# Altium PCB LUMW.PcbDoc
Units mil, origin at the board's own origin, x right, y up, seen from the top; angles counter-clockwise.
Board outline 330 x 670 mil, 2 copper layers (Top Layer, Bottom Layer); 4 components, 4 nets, 9 pads, 1 vias.
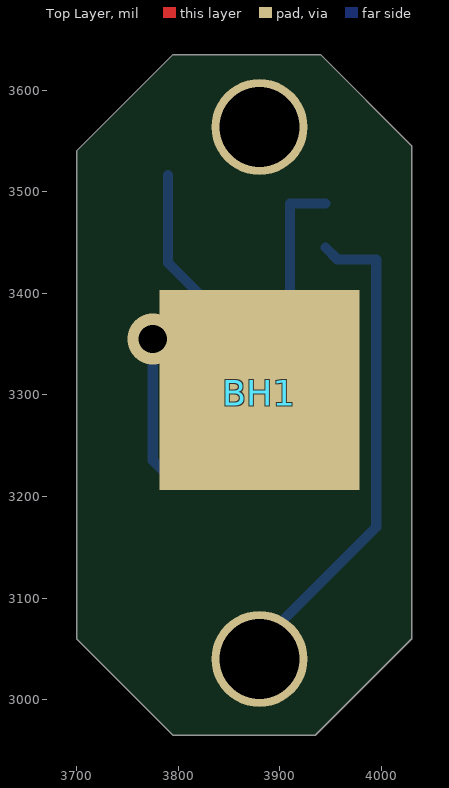
[diagram p0: Top Layer view]
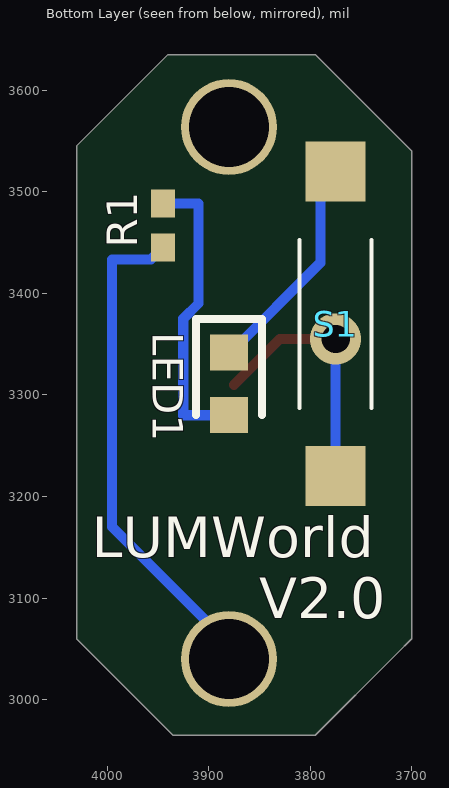
[diagram p1: Bottom Layer view, seen from below]

## Layer stack, top to bottom
Top Solder: solder mask 0.4, Solder Resist, Dk 3.5
Top Layer: signal copper 1.4
Dielectric 1: dielectric 12.6, FR-4, Dk 4.8
Bottom Layer: signal copper 1.4
Bottom Solder: solder mask 0.4, Solder Resist, Dk 3.5

## Board outline
3700,3060 3715,3045 3795,2965 3935,2965 4030,3060 4030,3545 3940,3635 3795,3635 3700,3540
cut-out: 3570,3775

## Design rules (kind name [scope] priority, off if disabled: settings)
Clearance [All] p1: gap=10 ignorepadtopadclearanceinfootprint=TRUE except(0: Arc-Hole Track-Hole SMDPad-Hole THPad-Hole Via-Hole Fill-Hole Poly-Hole Region-Hole Text-Hole)
PolygonConnect [All] p1: connectstyle=Relief reliefconductorwidth=10 reliefentries=4 polygonreliefangle="90 Angle" airgapwidth=10
RoutingVias [All] p1: holewidth=28 width=50 viastyle="Through Hole" minholewidth=28 minwidth=50 maxholewidth=28 maxwidth=50
SolderMaskExpansion [All] p1: expansion=4
Width [All] p1: maxlimit=10 minlimit=10 preferedwidth=10
30 further rules are at their usual default settings.

## Components (designator, comment, footprint, x,y, rotation, side; value= is the part's Value field where it differs from the comment)
BH1 "Battery" BHX1-1025-PC 3880,3040 r90 top
LED1 "LTST-C191KGKT" LEDC1608X55N 3880,3311.5 r270 bottom
R1 "0-100" RESC1005X40N 3945,3466.65 r270 bottom
S1 "RI-80SMD0515-J" RI80SMD0510J 3775,3370 r270 bottom

## Footprints (in the part's own frame and the unit in brackets; to place one, negate y for a bottom-side part, rotate by r counter-clockwise, add the part's x,y. Pads: shape width x height; smd on the part's side, far side on the other; paste and mask are expansions set on the pad)
BHX1-1025-PC [mm]
  round 2.4 hole 2: 1(0,0) 2(13.3,0)
  rect 5x5 smd: 3(6.731,0)
  body extent -0.76,-3.43 14.06,4.83, height 3.56
LEDC1608X55N [mm]
  rect 0.9x0.95 smd: 1(-0.762,0) 2(0.8,0)
  silkscreen extent -1.6,-0.82 0.8,0.82, body extent -1.14,-0.45 1.14,0.45, height 0.51
RESC1005X40N [mm]
  rect 0.7x0.6 smd: 1(-0.55,0) 2(0.55,0)
  body extent -0.5,-0.25 0.5,0.25, height 1.27
RI80SMD0510J [mm]
  rect 1.5x1.5 smd: 1(-3.81,0) 2(3.81,0)
  silkscreen extent -2.1,-0.9 2.1,0.9

## Part data
BH1: library part BH?, "Battery Holder for BK-870"
LED1: "LED", Manufacturer_Name=Lite-On, Mouser Part Number=859-LTST-C191KGKT, RS Part Number=6921010P, Datasheet Link=http://www.mouser.com/ds/2/239/S_110_LTST-C191KGKT-369560.pdf, Height=0.55mm, Manufacturer_Part_Number=LTST-C191KGKT, Mouser Price/Stock=https://www.mouser.com/Search/Refine.aspx?Keyword=859-LTST-C191KGKT, RS Price/Stock=http://uk.rs-online.com/web/p/products/6921010P
R1: library part RMCF0402ZT0R00, "Resistor", Manufacturer_Name="Stackpole Electronics Inc.", Datasheet Link=https://www.seielect.com/catalog/sei-rmcf_rmcp.pdf, Height=0.4mm, Manufacturer_Part_Number=RMCF0402ZT0R00
S1: "Switch", Manufacturer_Name="Coto Technology", Mouser Part Number=816-RI-80SMD0515-J, Datasheet Link=http://www.comus-intl.com/wp-content/uploads/2018/10/RI-80SMD.pdf, Manufacturer_Part_Number=RI-80SMD0515-J, Mouser Price/Stock=https://www.mouser.com/Search/Refine.aspx?Keyword=816-RI-80SMD0515-J

## Via types
v1: diameter 50, hole 28, Top Layer to Bottom Layer, 1 vias

## Nets (pads, with @x,y where several pads share a name; then routed paths per layer and width w, separated by ;. In a path a pad name is that pad's centre, name@x,y a point inside that pad or via, vN(x,y) a via of type N, cw(c..) or ccw(c..) an arc to the next point about the centre after c; other vN are vias at no path point)
NetBH1_1: BH1.1 R1.2 | length 495
  Bottom Layer w10: BH1.1@3870,3045 3995,3170 3995,3433.35 3956.65,3433.35 R1.2
NetBH1_3: BH1.3 S1.2 | length 263.6
  Top Layer w10: v1(3775,3355) 3830,3355 BH1.3@3875,3310
  Bottom Layer w10: v1(3775,3355) 3775,3235.56 3790,3220.56 S1.2@3790,3216.26
NetLED1_1: LED1.1 S1.1 | length 211.4
  Bottom Layer w10: S1.1@3790,3516.26 3790,3430 LED1.1@3878.5,3341.5
NetLED1_2: LED1.2 R1.1 | length 294.5
  Bottom Layer w10: LED1.2 3925,3280 3925,3375 3910,3390 3910,3488.31 R1.1
pads on no net: BH1.2

## Silkscreen, mask and mechanical layers (free items; w line width, h text height)
Bottom Overlay:
  text "LUMWorld" at 4015,3140 h40
  text "V2.0" at 3850,3080 h40
Mechanical 2:
  lines w20: 3700,3060 3715,3045 3795,2965 3865,2965 3935,2965 4030,3060 4030,3545 3940,3635 3795,3635 3700,3540 3700,3060